# Altium PCB Ender-3.PcbDoc (part 9 of 14)
Units mil, origin at the board's own origin, x right, y up, seen from the top; angles counter-clockwise.
Board outline 3970.48 x 2769.68 mil, 2 copper layers (TopLayer, BottomLayer); 146 components, 136 nets, 669 pads, 614 vias.
Unrouted connection lines stored in the file: 1.
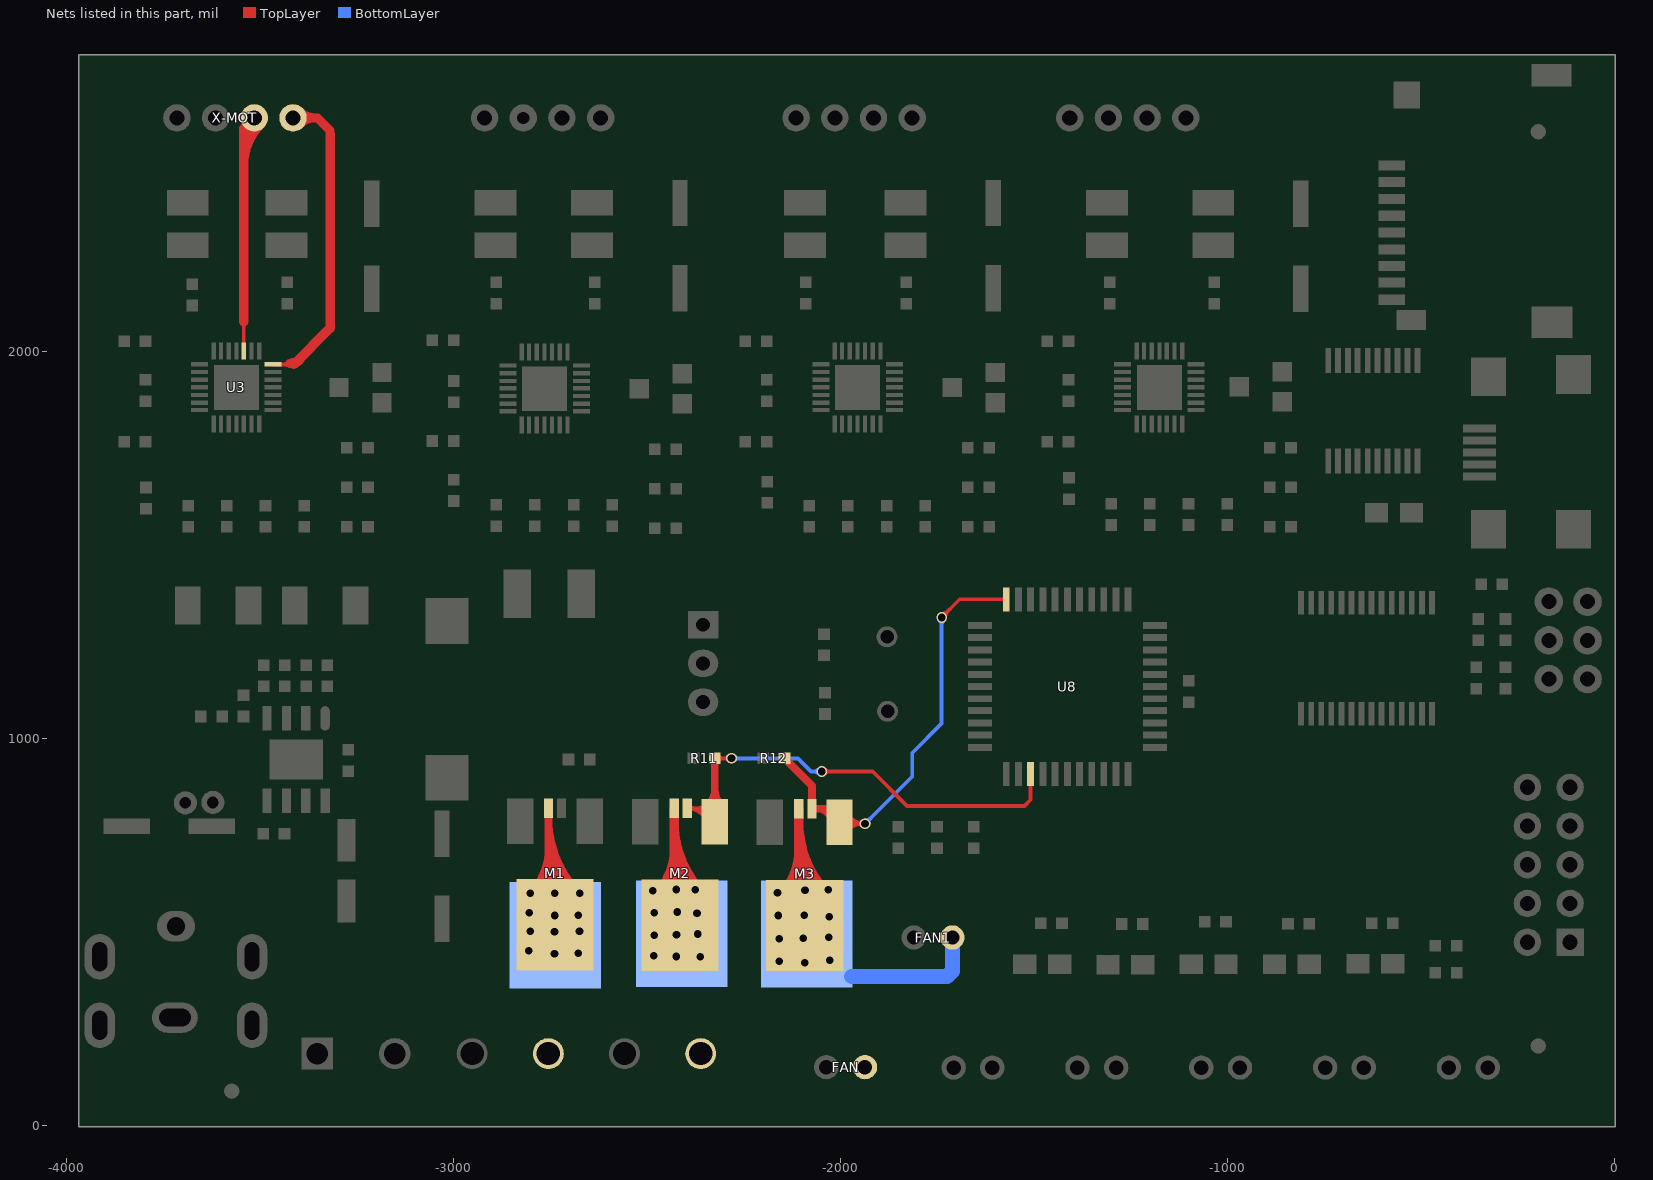
[diagram p9: the nets of this part, all layers, seen from the top]

## Via types
v1: diameter 28, hole 18, TopLayer to BottomLayer, tented both sides, 246 vias
v2: diameter 27.56, hole 19.68, TopLayer to BottomLayer, tented both sides, 196 vias
v3: diameter 20, hole 12, TopLayer to BottomLayer, tented both sides, 124 vias
v4: diameter 27.56, hole 11.81, TopLayer to BottomLayer, tented bottom, 16 vias
v5: diameter 27.56, hole 19.68, TopLayer to BottomLayer, 16 vias
v6: diameter 20, hole 12, TopLayer to BottomLayer, 12 vias
v7: diameter 28, hole 11.81, TopLayer to BottomLayer, tented both sides, 4 vias

## Nets (pads, with @x,y where several pads share a name; then routed paths per layer and width w, separated by ;. In a path a pad name is that pad's centre, name@x,y a point inside that pad or via, vN(x,y) a via of type N, cw(c..) or ccw(c..) an arc to the next point about the centre after c; other vN are vias at no path point) (continued)
NetW1_2: ?.2@-2754.54,820.84 M1.2 pad.0@-2736.54,492.84 pad.1@-2754.69,186.84 | length 7772.8
  TopLayer w10: M1.2@-2754.54,536.84 M1.2@-2737.54,519.84 ; M1.2@-2748.46,549.08 ccw(c-2732.21,540.5) M1.2@-2745.2,527.51 ; M1.2@-2748.46,549.08 ccw(c-2732.21,540.5) M1.2@-2745.2,527.51 ; M1.2@-2748.46,549.08 ccw(c-2732.21,540.5) M1.2@-2745.2,527.51 ; M1.2@-2748.46,549.08 ccw(c-2732.21,540.5) M1.2@-2745.2,527.51 ; M1.2@-2748.46,549.08 ccw(c-2732.21,540.5) M1.2@-2745.2,527.51 ; M1.2@-2748.46,549.08 ccw(c-2732.21,540.5) M1.2@-2745.2,527.51 ; M1.2@-2748.46,549.08 ccw(c-2732.21,540.5) M1.2@-2745.2,527.51 ; M1.2@-2739.61,544.41 ccw(c-2719.67,533.88) M1.2@-2735.62,517.93 ; M1.2@-2739.61,544.41 ccw(c-2719.67,533.88) M1.2@-2735.62,517.93 ; M1.2@-2739.61,544.41 ccw(c-2719.67,533.88) M1.2@-2735.62,517.93 ; M1.2@-2739.61,544.41 ccw(c-2719.67,533.88) M1.2@-2735.62,517.93 ; M1.2@-2739.61,544.41 ccw(c-2719.67,533.88) M1.2@-2735.62,517.93 ; M1.2@-2739.61,544.41 ccw(c-2719.67,533.88) M1.2@-2735.62,517.93 ; M1.2@-2739.61,544.41 ccw(c-2719.67,533.88) M1.2@-2735.62,517.93
  TopLayer w20: M1.2@-2754.54,536.84 ?.2@-2754.54,820.84 ; v2(-2801.17,601.48) ccw(c-2913.77,714.08) -2754.54,714.08 ; v2(-2801.17,601.48) ccw(c-2913.77,714.08) -2754.54,714.08 ; v2(-2801.17,601.48) ccw(c-2913.77,714.08) -2754.54,714.08 ; v2(-2801.17,601.48) ccw(c-2913.77,714.08) -2754.54,714.08 ; v2(-2801.17,601.48) ccw(c-2913.77,714.08) -2754.54,714.08 ; v2(-2801.17,601.48) ccw(c-2913.77,714.08) -2754.54,714.08 ; M1.2@-2787.03,587.34 ccw(c-2865.49,665.8) -2754.54,665.8 ; M1.2@-2787.03,587.34 ccw(c-2865.49,665.8) -2754.54,665.8 ; M1.2@-2787.03,587.34 ccw(c-2865.49,665.8) -2754.54,665.8 ; M1.2@-2787.03,587.34 ccw(c-2865.49,665.8) -2754.54,665.8 ; M1.2@-2787.03,587.34 ccw(c-2865.49,665.8) -2754.54,665.8 ; M1.2@-2787.03,587.34 ccw(c-2865.49,665.8) -2754.54,665.8 ; M1.2@-2754.9,454.45 cw(c-2691.14,454.45) M1.2@-2736.22,499.53 ; M1.2@-2754.9,454.45 cw(c-2691.14,454.45) M1.2@-2736.22,499.53 ; M1.2@-2754.9,454.45 cw(c-2691.14,454.45) M1.2@-2736.22,499.53 ; M1.2@-2754.9,454.45 cw(c-2691.14,454.45) M1.2@-2736.22,499.53 ; M1.2@-2754.9,454.45 cw(c-2691.14,454.45) M1.2@-2736.22,499.53 ; M1.2@-2754.9,454.45 cw(c-2691.14,454.45) M1.2@-2736.22,499.53 ; M1.2@-2754.9,454.45 cw(c-2691.14,454.45) M1.2@-2736.22,499.53 ; M1.2@-2754.9,454.45 cw(c-2691.14,454.45) M1.2@-2736.22,499.53 ; M1.2@-2754.9,492.95 ccw(c-2691.14,492.95) M1.2@-2736.22,447.88 ; M1.2@-2754.9,492.95 ccw(c-2691.14,492.95) M1.2@-2736.22,447.88 ; M1.2@-2754.9,492.95 ccw(c-2691.14,492.95) M1.2@-2736.22,447.88 ; M1.2@-2754.9,492.95 ccw(c-2691.14,492.95) M1.2@-2736.22,447.88 ; M1.2@-2754.9,492.95 ccw(c-2691.14,492.95) M1.2@-2736.22,447.88 ; M1.2@-2754.9,492.95 ccw(c-2691.14,492.95) M1.2@-2736.22,447.88 ; M1.2@-2754.9,492.95 ccw(c-2691.14,492.95) M1.2@-2736.22,447.88 ; M1.2@-2754.9,492.95 ccw(c-2691.14,492.95) M1.2@-2736.22,447.88 ; M1.2@-2754.54,553.09 cw(c-2690.78,553.09) M1.2@-2735.86,598.17 ; M1.2@-2754.54,553.09 cw(c-2690.78,553.09) M1.2@-2735.86,598.17 ; M1.2@-2754.54,553.09 cw(c-2690.78,553.09) M1.2@-2735.86,598.17 ; M1.2@-2754.54,553.09 cw(c-2690.78,553.09) M1.2@-2735.86,598.17 ; M1.2@-2754.54,553.09 cw(c-2690.78,553.09) M1.2@-2735.86,598.17 ; M1.2@-2754.54,553.09 cw(c-2690.78,553.09) M1.2@-2735.86,598.17 ; M1.2@-2754.54,553.09 cw(c-2690.78,553.09) M1.2@-2735.86,598.17 ; M1.2@-2754.54,553.09 cw(c-2690.78,553.09) M1.2@-2735.86,598.17 ; M1.2@-2754.54,591.59 ccw(c-2690.78,591.59) M1.2@-2735.86,546.51 ; M1.2@-2754.54,591.59 ccw(c-2690.78,591.59) M1.2@-2735.86,546.51 ; M1.2@-2754.54,591.59 ccw(c-2690.78,591.59) M1.2@-2735.86,546.51 ; M1.2@-2754.54,591.59 ccw(c-2690.78,591.59) M1.2@-2735.86,546.51 ; M1.2@-2754.54,591.59 ccw(c-2690.78,591.59) M1.2@-2735.86,546.51 ; M1.2@-2754.54,591.59 ccw(c-2690.78,591.59) M1.2@-2735.86,546.51 ; M1.2@-2754.54,591.59 ccw(c-2690.78,591.59) M1.2@-2735.86,546.51 ; M1.2@-2754.54,591.59 ccw(c-2690.78,591.59) M1.2@-2735.86,546.51 ; -2754.54,648.59 ccw(c-2690.78,648.59) M1.2@-2735.86,603.51 ; -2754.54,648.59 ccw(c-2690.78,648.59) M1.2@-2735.86,603.51 ; -2754.54,648.59 ccw(c-2690.78,648.59) M1.2@-2735.86,603.51 ; -2754.54,648.59 ccw(c-2690.78,648.59) M1.2@-2735.86,603.51 ; -2754.54,648.59 ccw(c-2690.78,648.59) M1.2@-2735.86,603.51 ; -2754.54,648.59 ccw(c-2690.78,648.59) M1.2@-2735.86,603.51 ; -2754.54,648.59 ccw(c-2690.78,648.59) M1.2@-2735.86,603.51 ; -2754.54,648.59 ccw(c-2690.78,648.59) M1.2@-2735.86,603.51 ; -2754.54,651.31 ccw(c-2624.07,651.31) M1.2@-2716.32,559.06 ; -2754.54,651.31 ccw(c-2624.07,651.31) M1.2@-2716.32,559.06 ; -2754.54,651.31 ccw(c-2624.07,651.31) M1.2@-2716.32,559.06 ; -2754.54,651.31 ccw(c-2624.07,651.31) M1.2@-2716.32,559.06 ; -2754.54,651.31 ccw(c-2624.07,651.31) M1.2@-2716.32,559.06 ; -2754.54,651.31 ccw(c-2624.07,651.31) M1.2@-2716.32,559.06 ; -2754.54,699.59 ccw(c-2575.78,699.59) M1.2@-2702.18,573.2 ; -2754.54,699.59 ccw(c-2575.78,699.59) M1.2@-2702.18,573.2 ; -2754.54,699.59 ccw(c-2575.78,699.59) M1.2@-2702.18,573.2 ; -2754.54,699.59 ccw(c-2575.78,699.59) M1.2@-2702.18,573.2 ; -2754.54,699.59 ccw(c-2575.78,699.59) M1.2@-2702.18,573.2 ; -2754.54,699.59 ccw(c-2575.78,699.59) M1.2@-2702.18,573.2 ; -2754.54,747.88 ccw(c-2527.5,747.88) M1.2@-2688.04,587.34 ; -2754.54,747.88 ccw(c-2527.5,747.88) M1.2@-2688.04,587.34 ; -2754.54,747.88 ccw(c-2527.5,747.88) M1.2@-2688.04,587.34 ; -2754.54,747.88 ccw(c-2527.5,747.88) M1.2@-2688.04,587.34 ; -2754.54,747.88 ccw(c-2527.5,747.88) M1.2@-2688.04,587.34 ; -2754.54,747.88 ccw(c-2527.5,747.88) M1.2@-2688.04,587.34 ; ?.2@-2754.54,796.16 ccw(c-2479.21,796.16) v2(-2673.9,601.48) ; ?.2@-2754.54,796.16 ccw(c-2479.21,796.16) v2(-2673.9,601.48) ; ?.2@-2754.54,796.16 ccw(c-2479.21,796.16) v2(-2673.9,601.48) ; ?.2@-2754.54,796.16 ccw(c-2479.21,796.16) v2(-2673.9,601.48) ; ?.2@-2754.54,796.16 ccw(c-2479.21,796.16) v2(-2673.9,601.48) ; ?.2@-2754.54,796.16 ccw(c-2479.21,796.16) v2(-2673.9,601.48)
  other v2: -2738.9,445.2 -2677.9,446.2 -2804.9,452.2 -2738.9,502.2 -2801.54,502.84 -2674.26,502.84 -2738.54,543.84 -2677.54,544.84 -2804.54,550.84 -2738.54,600.84
NetW2_1: ?.1@-2395.54,820.84 M2.1 R11.1 U8.14 | length 5838.6
  TopLayer w10: M2.1@-2324.54,785.84 -2359.54,820.84 ; R11.1@-2324.54,949.84 v2(-2281.54,949.84) ; v2(-2048.54,915.84) -1916.54,915.84 -1827.54,826.84 -1524.54,826.84 -1508.54,842.84 U8.14@-1508.54,908.84 ; ?.1@-2395.54,820.84 cw(c-2395.53,765.72) M2.1@-2349.01,795.29 ; ?.1@-2395.54,820.84 cw(c-2395.53,765.72) M2.1@-2349.01,795.29 ; ?.1@-2395.54,820.84 cw(c-2395.53,765.72) M2.1@-2349.01,795.29 ; ?.1@-2395.54,820.84 cw(c-2395.53,765.72) M2.1@-2349.01,795.29 ; ?.1@-2395.54,820.84 cw(c-2395.53,765.72) M2.1@-2349.01,795.29 ; ?.1@-2395.54,820.84 cw(c-2395.53,765.72) M2.1@-2349.01,795.29 ; ?.1@-2395.54,820.84 cw(c-2395.53,765.72) M2.1@-2349.01,795.29 ; ?.1@-2395.54,820.84 cw(c-2395.53,765.72) M2.1@-2349.01,795.29 ; ?.1@-2395.54,820.84 cw(c-2395.53,765.72) M2.1@-2349.01,795.29 ; ?.1@-2395.54,820.84 -2359.54,820.84 ; ?.1@-2390.59,815.89 cw(c-2378.64,803.94) -2378.64,820.84 ; ?.1@-2390.59,815.89 cw(c-2378.64,803.94) -2378.64,820.84 ; ?.1@-2390.59,815.89 cw(c-2378.64,803.94) -2378.64,820.84 ; ?.1@-2390.59,815.89 cw(c-2378.64,803.94) -2378.64,820.84 ; ?.1@-2390.59,815.89 cw(c-2378.64,803.94) -2378.64,820.84 ; ?.1@-2390.59,815.89 cw(c-2378.64,803.94) -2378.64,820.84 ; ?.1@-2390.59,815.89 cw(c-2378.64,803.94) -2378.64,820.84 ; ?.1@-2390.59,815.89 cw(c-2378.64,803.94) -2378.64,820.84 ; ?.1@-2390.59,815.89 cw(c-2378.64,803.94) -2378.64,820.84 ; ?.1@-2390.59,825.79 ccw(c-2378.64,837.74) -2378.64,820.84 ; ?.1@-2390.59,825.79 ccw(c-2378.64,837.74) -2378.64,820.84 ; ?.1@-2390.59,825.79 ccw(c-2378.64,837.74) -2378.64,820.84 ; ?.1@-2390.59,825.79 ccw(c-2378.64,837.74) -2378.64,820.84 ; ?.1@-2390.59,825.79 ccw(c-2378.64,837.74) -2378.64,820.84 ; ?.1@-2390.59,825.79 ccw(c-2378.64,837.74) -2378.64,820.84 ; ?.1@-2390.59,825.79 ccw(c-2378.64,837.74) -2378.64,820.84 ; ?.1@-2390.59,825.79 ccw(c-2378.64,837.74) -2378.64,820.84 ; ?.1@-2390.59,825.79 ccw(c-2378.64,837.74) -2378.64,820.84 ; -2377.33,820.84 cw(c-2377.33,777.29) M2.1@-2340.57,800.65 ; -2377.33,820.84 cw(c-2377.33,777.29) M2.1@-2340.57,800.65 ; -2377.33,820.84 cw(c-2377.33,777.29) M2.1@-2340.57,800.65 ; -2377.33,820.84 cw(c-2377.33,777.29) M2.1@-2340.57,800.65 ; -2377.33,820.84 cw(c-2377.33,777.29) M2.1@-2340.57,800.65 ; -2377.33,820.84 cw(c-2377.33,777.29) M2.1@-2340.57,800.65 ; -2377.33,820.84 cw(c-2377.33,777.29) M2.1@-2340.57,800.65 ; -2377.33,820.84 cw(c-2377.33,777.29) M2.1@-2340.57,800.65 ; -2377.33,820.84 cw(c-2377.33,777.29) M2.1@-2340.57,800.65 ; -2370.41,820.84 ccw(c-2370.41,856.71) M2.1@-2345.04,831.35 ; -2370.41,820.84 ccw(c-2370.41,856.71) M2.1@-2345.04,831.35 ; -2370.41,820.84 ccw(c-2370.41,856.71) M2.1@-2345.04,831.35 ; -2370.41,820.84 ccw(c-2370.41,856.71) M2.1@-2345.04,831.35 ; -2370.41,820.84 ccw(c-2370.41,856.71) M2.1@-2345.04,831.35 ; -2370.41,820.84 ccw(c-2370.41,856.71) M2.1@-2345.04,831.35 ; -2370.41,820.84 ccw(c-2370.41,856.71) M2.1@-2345.04,831.35 ; -2370.41,820.84 ccw(c-2370.41,856.71) M2.1@-2345.04,831.35 ; -2370.41,820.84 ccw(c-2370.41,856.71) M2.1@-2345.04,831.35 ; -2359.53,820.84 ccw(c-2359.53,833.58) M2.1@-2348.85,826.64 ; -2359.53,820.84 ccw(c-2359.53,833.58) M2.1@-2348.85,826.64 ; -2359.53,820.84 ccw(c-2359.53,833.58) M2.1@-2348.85,826.64 ; -2359.53,820.84 ccw(c-2359.53,833.58) M2.1@-2348.85,826.64 ; -2359.53,820.84 ccw(c-2359.53,833.58) M2.1@-2348.85,826.64 ; -2359.53,820.84 ccw(c-2359.53,833.58) M2.1@-2348.85,826.64 ; -2359.53,820.84 ccw(c-2359.53,833.58) M2.1@-2348.85,826.64 ; -2359.53,820.84 ccw(c-2359.53,833.58) M2.1@-2348.85,826.64 ; -2359.53,820.84 ccw(c-2359.53,833.58) M2.1@-2348.85,826.64 ; -2359.12,820.84 cw(c-2359.12,788.86) M2.1@-2332.13,806.02 ; -2359.12,820.84 cw(c-2359.12,788.86) M2.1@-2332.13,806.02 ; -2359.12,820.84 cw(c-2359.12,788.86) M2.1@-2332.13,806.02 ; -2359.12,820.84 cw(c-2359.12,788.86) M2.1@-2332.13,806.02 ; -2359.12,820.84 cw(c-2359.12,788.86) M2.1@-2332.13,806.02 ; -2359.12,820.84 cw(c-2359.12,788.86) M2.1@-2332.13,806.02 ; -2359.12,820.84 cw(c-2359.12,788.86) M2.1@-2332.13,806.02 ; -2359.12,820.84 cw(c-2359.12,788.86) M2.1@-2332.13,806.02 ; -2359.12,820.84 cw(c-2359.12,788.86) M2.1@-2332.13,806.02 ; M2.1@-2345.04,831.35 ccw(c-2394.55,880.85) -2324.54,880.85 ; M2.1@-2345.04,831.35 ccw(c-2394.55,880.85) -2324.54,880.85 ; M2.1@-2345.04,831.35 ccw(c-2394.55,880.85) -2324.54,880.85 ; M2.1@-2345.04,831.35 ccw(c-2394.55,880.85) -2324.54,880.85 ; M2.1@-2345.04,831.35 ccw(c-2394.55,880.85) -2324.54,880.85 ; M2.1@-2337.97,824.28 ccw(c-2370.41,856.71) -2324.54,856.71 ; M2.1@-2337.97,824.28 ccw(c-2370.41,856.71) -2324.54,856.71 ; M2.1@-2337.97,824.28 ccw(c-2370.41,856.71) -2324.54,856.71 ; M2.1@-2337.97,824.28 ccw(c-2370.41,856.71) -2324.54,856.71 ; M2.1@-2337.97,824.28 ccw(c-2370.41,856.71) -2324.54,856.71 ; R11.1@-2331.61,942.77 cw(c-2348.68,925.7) -2324.54,925.7 ; R11.1@-2331.61,942.77 cw(c-2348.68,925.7) -2324.54,925.7 ; R11.1@-2331.61,942.77 cw(c-2348.68,925.7) -2324.54,925.7 ; R11.1@-2331.61,942.77 cw(c-2348.68,925.7) -2324.54,925.7 ; R11.1@-2331.61,942.77 cw(c-2348.68,925.7) -2324.54,925.7 ; -2324.54,856.71 ccw(c-2278.67,856.71) M2.1@-2311.1,824.28 ; -2324.54,856.71 ccw(c-2278.67,856.71) M2.1@-2311.1,824.28 ; -2324.54,856.71 ccw(c-2278.67,856.71) M2.1@-2311.1,824.28 ; -2324.54,856.71 ccw(c-2278.67,856.71) M2.1@-2311.1,824.28 ; -2324.54,856.71 ccw(c-2278.67,856.71) M2.1@-2311.1,824.28 ; -2324.54,880.85 ccw(c-2254.52,880.85) M2.1@-2304.03,831.35 ; -2324.54,880.85 ccw(c-2254.52,880.85) M2.1@-2304.03,831.35 ; -2324.54,880.85 ccw(c-2254.52,880.85) M2.1@-2304.03,831.35 ; -2324.54,880.85 ccw(c-2254.52,880.85) M2.1@-2304.03,831.35 ; -2324.54,880.85 ccw(c-2254.52,880.85) M2.1@-2304.03,831.35 ; -2324.54,925.7 cw(c-2300.39,925.7) R11.1@-2317.46,942.77 ; -2324.54,925.7 cw(c-2300.39,925.7) R11.1@-2317.46,942.77 ; -2324.54,925.7 cw(c-2300.39,925.7) R11.1@-2317.46,942.77 ; -2324.54,925.7 cw(c-2300.39,925.7) R11.1@-2317.46,942.77 ; -2324.54,925.7 cw(c-2300.39,925.7) R11.1@-2317.46,942.77 ; R11.1@-2317.46,942.77 cw(c-2300.39,925.7) -2300.39,949.84 ; R11.1@-2317.46,942.77 cw(c-2300.39,925.7) -2300.39,949.84 ; R11.1@-2317.46,942.77 cw(c-2300.39,925.7) -2300.39,949.84 ; R11.1@-2317.46,942.77 cw(c-2300.39,925.7) -2300.39,949.84 ; R11.1@-2317.46,942.77 cw(c-2300.39,925.7) -2300.39,949.84 ; R11.1@-2317.46,942.77 cw(c-2300.39,925.7) -2300.39,949.84 ; R11.1@-2317.46,942.77 cw(c-2300.39,925.7) -2300.39,949.84 ; R11.1@-2317.46,942.77 cw(c-2300.39,925.7) -2300.39,949.84 ; R11.1@-2317.46,942.77 cw(c-2300.39,925.7) -2300.39,949.84 ; R11.1@-2317.46,956.91 ccw(c-2300.39,973.98) -2300.39,949.84 ; R11.1@-2317.46,956.91 ccw(c-2300.39,973.98) -2300.39,949.84 ; R11.1@-2317.46,956.91 ccw(c-2300.39,973.98) -2300.39,949.84 ; R11.1@-2317.46,956.91 ccw(c-2300.39,973.98) -2300.39,949.84 ; R11.1@-2317.46,956.91 ccw(c-2300.39,973.98) -2300.39,949.84 ; R11.1@-2317.46,956.91 ccw(c-2300.39,973.98) -2300.39,949.84 ; R11.1@-2317.46,956.91 ccw(c-2300.39,973.98) -2300.39,949.84 ; R11.1@-2317.46,956.91 ccw(c-2300.39,973.98) -2300.39,949.84 ; R11.1@-2317.46,956.91 ccw(c-2300.39,973.98) -2300.39,949.84 ; -2302.73,949.84 cw(c-2302.73,928.65) v2@-2287.74,943.63 ; -2302.73,949.84 ccw(c-2302.73,971.04) v2@-2287.74,956.05 ; -2302.73,949.84 cw(c-2302.73,928.65) v2@-2287.74,943.63 ; -2302.73,949.84 ccw(c-2302.73,971.04) v2@-2287.74,956.05 ; -2302.73,949.84 cw(c-2302.73,928.65) v2@-2287.74,943.63 ; -2302.73,949.84 ccw(c-2302.73,971.04) v2@-2287.74,956.05 ; -2302.73,949.84 cw(c-2302.73,928.65) v2@-2287.74,943.63 ; -2302.73,949.84 ccw(c-2302.73,971.04) v2@-2287.74,956.05 ; -2302.73,949.84 cw(c-2302.73,928.65) v2@-2287.74,943.63 ; -2302.73,949.84 ccw(c-2302.73,971.04) v2@-2287.74,956.05 ; -2302.73,949.84 ccw(c-2302.73,971.04) v2@-2287.74,956.05 ; -2302.73,949.84 cw(c-2302.73,928.65) v2@-2287.74,943.63 ; -2302.73,949.84 ccw(c-2302.73,971.04) v2@-2287.74,956.05 ; -2302.73,949.84 cw(c-2302.73,928.65) v2@-2287.74,943.63 ; -2302.73,949.84 ccw(c-2302.73,971.04) v2@-2287.74,956.05 ; -2302.73,949.84 cw(c-2302.73,928.65) v2@-2287.74,943.63 ; -2302.73,949.84 ccw(c-2302.73,971.04) v2@-2287.74,956.05 ; -2302.73,949.84 cw(c-2302.73,928.65) v2@-2287.74,943.63 ; v2@-2042.33,909.63 cw(c-2027.34,894.65) -2027.34,915.84 ; v2@-2042.33,909.63 cw(c-2027.34,894.65) -2027.34,915.84 ; v2@-2042.33,909.63 cw(c-2027.34,894.65) -2027.34,915.84 ; v2@-2042.33,909.63 cw(c-2027.34,894.65) -2027.34,915.84 ; v2@-2042.33,909.63 cw(c-2027.34,894.65) -2027.34,915.84 ; v2@-2042.33,909.63 cw(c-2027.34,894.65) -2027.34,915.84 ; v2@-2042.33,909.63 cw(c-2027.34,894.65) -2027.34,915.84 ; v2@-2042.33,922.05 ccw(c-2027.34,937.04) -2027.34,915.84 ; v2@-2042.33,922.05 ccw(c-2027.34,937.04) -2027.34,915.84 ; v2@-2042.33,922.05 ccw(c-2027.34,937.04) -2027.34,915.84 ; v2@-2042.33,922.05 ccw(c-2027.34,937.04) -2027.34,915.84 ; v2@-2042.33,922.05 ccw(c-2027.34,937.04) -2027.34,915.84 ; v2@-2042.33,922.05 ccw(c-2027.34,937.04) -2027.34,915.84 ; v2@-2042.33,922.05 ccw(c-2027.34,937.04) -2027.34,915.84 ; U8.14@-1511.36,884.01 cw(c-1518.19,877.19) -1508.54,877.19 ; U8.14@-1511.36,884.01 cw(c-1518.19,877.19) -1508.54,877.19 ; U8.14@-1511.36,884.01 cw(c-1518.19,877.19) -1508.54,877.19 ; U8.14@-1511.36,884.01 cw(c-1518.19,877.19) -1508.54,877.19 ; U8.14@-1511.36,884.01 cw(c-1518.19,877.19) -1508.54,877.19 ; U8.14@-1511.36,884.01 cw(c-1518.19,877.19) -1508.54,877.19 ; -1508.54,877.19 cw(c-1498.88,877.19) U8.14@-1505.71,884.01 ; -1508.54,877.19 cw(c-1498.88,877.19) U8.14@-1505.71,884.01 ; -1508.54,877.19 cw(c-1498.88,877.19) U8.14@-1505.71,884.01 ; -1508.54,877.19 cw(c-1498.88,877.19) U8.14@-1505.71,884.01 ; -1508.54,877.19 cw(c-1498.88,877.19) U8.14@-1505.71,884.01 ; -1508.54,877.19 cw(c-1498.88,877.19) U8.14@-1505.71,884.01
  TopLayer w20: M2.1@-2324.54,785.84 R11.1@-2324.54,949.84 ; M2.1@-2341.51,827.81 ccw(c-2382.48,868.78) -2324.54,868.78 ; M2.1@-2341.51,827.81 ccw(c-2382.48,868.78) -2324.54,868.78 ; M2.1@-2341.51,827.81 ccw(c-2382.48,868.78) -2324.54,868.78 ; M2.1@-2341.51,827.81 ccw(c-2382.48,868.78) -2324.54,868.78 ; -2324.54,868.78 ccw(c-2266.59,868.78) M2.1@-2307.56,827.81 ; -2324.54,868.78 ccw(c-2266.59,868.78) M2.1@-2307.56,827.81 ; -2324.54,868.78 ccw(c-2266.59,868.78) M2.1@-2307.56,827.81 ; -2324.54,868.78 ccw(c-2266.59,868.78) M2.1@-2307.56,827.81
  BottomLayer w10: v2(-2281.54,949.84) -2109.54,949.84 -2075.54,915.84 v2(-2048.54,915.84) ; v2@-2275.33,943.63 cw(c-2260.34,928.65) -2260.34,949.84 ; v2@-2275.33,943.63 cw(c-2260.34,928.65) -2260.34,949.84 ; v2@-2275.33,943.63 cw(c-2260.34,928.65) -2260.34,949.84 ; v2@-2275.33,943.63 cw(c-2260.34,928.65) -2260.34,949.84 ; v2@-2275.33,943.63 cw(c-2260.34,928.65) -2260.34,949.84 ; v2@-2275.33,943.63 cw(c-2260.34,928.65) -2260.34,949.84 ; v2@-2275.33,943.63 cw(c-2260.34,928.65) -2260.34,949.84 ; v2@-2275.33,943.63 cw(c-2260.34,928.65) -2260.34,949.84 ; v2@-2275.33,943.63 cw(c-2260.34,928.65) -2260.34,949.84 ; v2@-2275.33,956.05 ccw(c-2260.34,971.04) -2260.34,949.84 ; v2@-2275.33,956.05 ccw(c-2260.34,971.04) -2260.34,949.84 ; v2@-2275.33,956.05 ccw(c-2260.34,971.04) -2260.34,949.84 ; v2@-2275.33,956.05 ccw(c-2260.34,971.04) -2260.34,949.84 ; v2@-2275.33,956.05 ccw(c-2260.34,971.04) -2260.34,949.84 ; v2@-2275.33,956.05 ccw(c-2260.34,971.04) -2260.34,949.84 ; v2@-2275.33,956.05 ccw(c-2260.34,971.04) -2260.34,949.84 ; v2@-2275.33,956.05 ccw(c-2260.34,971.04) -2260.34,949.84 ; v2@-2275.33,956.05 ccw(c-2260.34,971.04) -2260.34,949.84 ; -2069.73,915.84 cw(c-2069.73,894.65) v2@-2054.74,909.63 ; -2069.73,915.84 ccw(c-2069.73,937.04) v2@-2054.74,922.05 ; -2069.73,915.84 cw(c-2069.73,894.65) v2@-2054.74,909.63 ; -2069.73,915.84 ccw(c-2069.73,937.04) v2@-2054.74,922.05 ; -2069.73,915.84 ccw(c-2069.73,937.04) v2@-2054.74,922.05 ; -2069.73,915.84 cw(c-2069.73,894.65) v2@-2054.74,909.63 ; -2069.73,915.84 ccw(c-2069.73,937.04) v2@-2054.74,922.05 ; -2069.73,915.84 cw(c-2069.73,894.65) v2@-2054.74,909.63
NetW2_2: ?.2@-2429.54,820.84 M2.2 pad.1@-2360.98,186.84 pad.1@-2409.54,496.84 | length 5072.2
  TopLayer w10: M2.2@-2429.54,535.84 M2.2@-2419.54,525.84
  TopLayer w24: M2.2@-2429.54,534.06 cw(c-2408.38,534.06) M2.2@-2420.51,551.38 ; ?.2@-2429.54,820.84 M2.2@-2429.54,535.84 ; M2.2@-2476.76,599.07 ccw(c-2590.77,713.08) -2429.54,713.08 ; M2.2@-2476.76,599.07 ccw(c-2590.77,713.08) -2429.54,713.08 ; M2.2@-2476.76,599.07 ccw(c-2590.77,713.08) -2429.54,713.08 ; M2.2@-2476.76,599.07 ccw(c-2590.77,713.08) -2429.54,713.08 ; M2.2@-2476.76,599.07 ccw(c-2590.77,713.08) -2429.54,713.08 ; M2.2@-2476.76,599.07 ccw(c-2590.77,713.08) -2429.54,713.08 ; M2.2@-2459.79,582.1 ccw(c-2532.83,655.14) -2429.54,655.14 ; M2.2@-2459.79,582.1 ccw(c-2532.83,655.14) -2429.54,655.14 ; M2.2@-2459.79,582.1 ccw(c-2532.83,655.14) -2429.54,655.14 ; M2.2@-2459.79,582.1 ccw(c-2532.83,655.14) -2429.54,655.14 ; M2.2@-2459.79,582.1 ccw(c-2532.83,655.14) -2429.54,655.14 ; M2.2@-2459.79,582.1 ccw(c-2532.83,655.14) -2429.54,655.14 ; M2.2@-2429.54,535.84 cw(c-2411.65,535.84) M2.2@-2420.64,551.3 ; M2.2@-2429.54,535.84 cw(c-2411.65,535.84) M2.2@-2420.64,551.3 ; M2.2@-2429.54,535.84 cw(c-2411.65,535.84) M2.2@-2420.64,551.3 ; M2.2@-2429.54,535.84 cw(c-2411.65,535.84) M2.2@-2420.64,551.3 ; M2.2@-2429.54,535.84 cw(c-2411.65,535.84) M2.2@-2420.64,551.3 ; M2.2@-2429.54,535.84 cw(c-2411.65,535.84) M2.2@-2420.64,551.3 ; M2.2@-2429.54,535.84 cw(c-2411.65,535.84) M2.2@-2420.64,551.3 ; M2.2@-2429.54,576.45 ccw(c-2397.93,576.45) M2.2@-2420.28,554.1 ; M2.2@-2429.54,576.45 ccw(c-2397.93,576.45) M2.2@-2420.28,554.1 ; M2.2@-2429.54,576.45 ccw(c-2397.93,576.45) M2.2@-2420.28,554.1 ; M2.2@-2429.54,576.45 ccw(c-2397.93,576.45) M2.2@-2420.28,554.1 ; M2.2@-2429.54,576.45 ccw(c-2397.93,576.45) M2.2@-2420.28,554.1 ; M2.2@-2429.54,576.45 ccw(c-2397.93,576.45) M2.2@-2420.28,554.1 ; M2.2@-2429.54,576.45 ccw(c-2397.93,576.45) M2.2@-2420.28,554.1 ; M2.2@-2429.54,576.45 ccw(c-2397.93,576.45) M2.2@-2420.28,554.1 ; M2.2@-2429.54,594.48 cw(c-2408.17,594.48) M2.2@-2423.28,609.58 ; M2.2@-2429.54,594.48 cw(c-2408.17,594.48) M2.2@-2423.28,609.58 ; M2.2@-2429.54,594.48 cw(c-2408.17,594.48) M2.2@-2423.28,609.58 ; M2.2@-2429.54,594.48 cw(c-2408.17,594.48) M2.2@-2423.28,609.58 ; M2.2@-2429.54,594.48 cw(c-2408.17,594.48) M2.2@-2423.28,609.58 ; M2.2@-2429.54,594.48 cw(c-2408.17,594.48) M2.2@-2423.28,609.58 ; M2.2@-2429.54,594.48 cw(c-2408.17,594.48) M2.2@-2423.28,609.58 ; M2.2@-2429.54,594.48 cw(c-2408.17,594.48) M2.2@-2423.28,609.58 ; M2.2@-2429.54,627.21 ccw(c-2408.17,627.21) M2.2@-2423.28,612.1 ; M2.2@-2429.54,627.21 ccw(c-2408.17,627.21) M2.2@-2423.28,612.1 ; M2.2@-2429.54,627.21 ccw(c-2408.17,627.21) M2.2@-2423.28,612.1 ; M2.2@-2429.54,627.21 ccw(c-2408.17,627.21) M2.2@-2423.28,612.1 ; M2.2@-2429.54,627.21 ccw(c-2408.17,627.21) M2.2@-2423.28,612.1 ; M2.2@-2429.54,627.21 ccw(c-2408.17,627.21) M2.2@-2423.28,612.1 ; M2.2@-2429.54,627.21 ccw(c-2408.17,627.21) M2.2@-2423.28,612.1 ; M2.2@-2429.54,627.21 ccw(c-2408.17,627.21) M2.2@-2423.28,612.1 ; -2429.54,669.62 ccw(c-2281.75,669.62) M2.2@-2386.25,565.13 ; -2429.54,669.62 ccw(c-2281.75,669.62) M2.2@-2386.25,565.13 ; -2429.54,669.62 ccw(c-2281.75,669.62) M2.2@-2386.25,565.13 ; -2429.54,669.62 ccw(c-2281.75,669.62) M2.2@-2386.25,565.13 ; -2429.54,669.62 ccw(c-2281.75,669.62) M2.2@-2386.25,565.13 ; -2429.54,669.62 ccw(c-2281.75,669.62) M2.2@-2386.25,565.13 ; -2429.54,727.57 ccw(c-2223.81,727.57) M2.2@-2369.28,582.1 ; -2429.54,727.57 ccw(c-2223.81,727.57) M2.2@-2369.28,582.1 ; -2429.54,727.57 ccw(c-2223.81,727.57) M2.2@-2369.28,582.1 ; -2429.54,727.57 ccw(c-2223.81,727.57) M2.2@-2369.28,582.1 ; -2429.54,727.57 ccw(c-2223.81,727.57) M2.2@-2369.28,582.1 ; -2429.54,727.57 ccw(c-2223.81,727.57) M2.2@-2369.28,582.1 ; -2429.54,785.51 ccw(c-2165.87,785.51) M2.2@-2352.31,599.07 ; -2429.54,785.51 ccw(c-2165.87,785.51) M2.2@-2352.31,599.07 ; -2429.54,785.51 ccw(c-2165.87,785.51) M2.2@-2352.31,599.07 ; -2429.54,785.51 ccw(c-2165.87,785.51) M2.2@-2352.31,599.07 ; -2429.54,785.51 ccw(c-2165.87,785.51) M2.2@-2352.31,599.07 ; -2429.54,785.51 ccw(c-2165.87,785.51) M2.2@-2352.31,599.07
  other v2: -2362.54,436.84 -2424.54,437.84 -2482.54,439.84 -2481.54,492.84 -2423.54,493.84 -2368.54,495.84 -2370.54,549.84 -2481.54,550.84 -2421.54,552.84 -2484.54,607.84 -2375.54,609.84 -2424.54,610.84
NetW3_1: ?.1@-2073.54,819.84 M3.1 R12.1 U8.44 | length 5458.6
  TopLayer w10: M3.1@-1979.33,802.24 ccw(c-1936.54,834.34) v2(-1936.54,780.84) -1998.54,780.84 -2037.54,819.84 ; -1956.54,780.84 cw(c-1956.54,819.34) M3.1@-1987.34,796.24 ; v2(-1738.54,1313.84) -1691.54,1360.84 U8.44@-1571.54,1360.84 ; R12.1@-2144.54,939.84 cw(c-2144.54,915.7) -2127.46,932.77 ; R12.1@-2144.54,939.84 cw(c-2144.54,915.7) -2127.46,932.77 ; R12.1@-2144.54,939.84 cw(c-2144.54,915.7) -2127.46,932.77 ; R12.1@-2144.54,939.84 cw(c-2144.54,915.7) -2127.46,932.77 ; R12.1@-2144.54,939.84 cw(c-2144.54,915.7) -2127.46,932.77 ; R12.1@-2134.54,949.84 ccw(c-2110.39,949.84) -2127.46,932.77 ; R12.1@-2134.54,949.84 ccw(c-2110.39,949.84) -2127.46,932.77 ; R12.1@-2134.54,949.84 ccw(c-2110.39,949.84) -2127.46,932.77 ; R12.1@-2134.54,949.84 ccw(c-2110.39,949.84) -2127.46,932.77 ; R12.1@-2134.54,949.84 ccw(c-2110.39,949.84) -2127.46,932.77 ; ?.1@-2078.49,837.79 ccw(c-2090.43,849.74) -2073.54,849.74 ; ?.1@-2078.49,837.79 ccw(c-2090.43,849.74) -2073.54,849.74 ; ?.1@-2078.49,837.79 ccw(c-2090.43,849.74) -2073.54,849.74 ; ?.1@-2073.54,819.84 cw(c-2073.53,764.72) M3.1@-2027.01,794.29 ; ?.1@-2073.54,819.84 cw(c-2073.53,764.72) M3.1@-2027.01,794.29 ; ?.1@-2073.54,819.84 cw(c-2073.53,764.72) M3.1@-2027.01,794.29 ; ?.1@-2073.54,819.84 cw(c-2073.53,764.72) M3.1@-2027.01,794.29 ; ?.1@-2073.54,819.84 cw(c-2073.53,764.72) M3.1@-2027.01,794.29 ; ?.1@-2073.54,819.84 cw(c-2073.53,764.72) M3.1@-2027.01,794.29 ; ?.1@-2073.54,819.84 cw(c-2073.53,764.72) M3.1@-2027.01,794.29 ; ?.1@-2073.54,819.84 cw(c-2073.53,764.72) M3.1@-2027.01,794.29 ; ?.1@-2073.54,819.84 cw(c-2073.53,764.72) M3.1@-2027.01,794.29 ; -2073.54,849.74 ccw(c-2056.64,849.74) ?.1@-2068.59,837.79 ; -2073.54,849.74 ccw(c-2056.64,849.74) ?.1@-2068.59,837.79 ; -2073.54,849.74 ccw(c-2056.64,849.74) ?.1@-2068.59,837.79 ; ?.1@-2068.59,814.89 cw(c-2056.64,802.94) -2056.64,819.84 ; ?.1@-2068.59,814.89 cw(c-2056.64,802.94) -2056.64,819.84 ; ?.1@-2068.59,814.89 cw(c-2056.64,802.94) -2056.64,819.84 ; ?.1@-2068.59,814.89 cw(c-2056.64,802.94) -2056.64,819.84 ; ?.1@-2068.59,814.89 cw(c-2056.64,802.94) -2056.64,819.84 ; ?.1@-2068.59,814.89 cw(c-2056.64,802.94) -2056.64,819.84 ; ?.1@-2068.59,814.89 cw(c-2056.64,802.94) -2056.64,819.84 ; ?.1@-2068.59,814.89 cw(c-2056.64,802.94) -2056.64,819.84 ; ?.1@-2068.59,814.89 cw(c-2056.64,802.94) -2056.64,819.84 ; ?.1@-2068.59,824.79 ccw(c-2056.64,836.74) -2056.64,819.84 ; ?.1@-2068.59,824.79 ccw(c-2056.64,836.74) -2056.64,819.84 ; ?.1@-2068.59,824.79 ccw(c-2056.64,836.74) -2056.64,819.84 ; ?.1@-2068.59,824.79 ccw(c-2056.64,836.74) -2056.64,819.84 ; ?.1@-2068.59,824.79 ccw(c-2056.64,836.74) -2056.64,819.84 ; ?.1@-2068.59,824.79 ccw(c-2056.64,836.74) -2056.64,819.84 ; ?.1@-2068.59,824.79 ccw(c-2056.64,836.74) -2056.64,819.84 ; ?.1@-2068.59,824.79 ccw(c-2056.64,836.74) -2056.64,819.84 ; ?.1@-2068.59,824.79 ccw(c-2056.64,836.74) -2056.64,819.84 ; -2055.33,819.84 cw(c-2055.33,776.29) M3.1@-2018.57,799.65 ; -2055.33,819.84 cw(c-2055.33,776.29) M3.1@-2018.57,799.65 ; -2055.33,819.84 cw(c-2055.33,776.29) M3.1@-2018.57,799.65 ; -2055.33,819.84 cw(c-2055.33,776.29) M3.1@-2018.57,799.65 ; -2055.33,819.84 cw(c-2055.33,776.29) M3.1@-2018.57,799.65 ; -2055.33,819.84 cw(c-2055.33,776.29) M3.1@-2018.57,799.65 ; -2055.33,819.84 cw(c-2055.33,776.29) M3.1@-2018.57,799.65 ; -2055.33,819.84 cw(c-2055.33,776.29) M3.1@-2018.57,799.65 ; -2055.33,819.84 cw(c-2055.33,776.29) M3.1@-2018.57,799.65 ; -2048.41,819.84 ccw(c-2048.41,855.71) M3.1@-2023.04,830.35 ; -2048.41,819.84 ccw(c-2048.41,855.71) M3.1@-2023.04,830.35 ; -2048.41,819.84 ccw(c-2048.41,855.71) M3.1@-2023.04,830.35 ; -2048.41,819.84 ccw(c-2048.41,855.71) M3.1@-2023.04,830.35 ; -2048.41,819.84 ccw(c-2048.41,855.71) M3.1@-2023.04,830.35 ; -2048.41,819.84 ccw(c-2048.41,855.71) M3.1@-2023.04,830.35 ; -2048.41,819.84 ccw(c-2048.41,855.71) M3.1@-2023.04,830.35 ; -2048.41,819.84 ccw(c-2048.41,855.71) M3.1@-2023.04,830.35 ; -2048.41,819.84 ccw(c-2048.41,855.71) M3.1@-2023.04,830.35 ; -2037.53,819.84 ccw(c-2037.53,832.58) M3.1@-2026.85,825.64 ; -2037.53,819.84 ccw(c-2037.53,832.58) M3.1@-2026.85,825.64 ; -2037.53,819.84 ccw(c-2037.53,832.58) M3.1@-2026.85,825.64 ; -2037.53,819.84 ccw(c-2037.53,832.58) M3.1@-2026.85,825.64 ; -2037.53,819.84 ccw(c-2037.53,832.58) M3.1@-2026.85,825.64 ; -2037.53,819.84 ccw(c-2037.53,832.58) M3.1@-2026.85,825.64 ; -2037.53,819.84 ccw(c-2037.53,832.58) M3.1@-2026.85,825.64 ; -2037.53,819.84 ccw(c-2037.53,832.58) M3.1@-2026.85,825.64 ; -2037.53,819.84 ccw(c-2037.53,832.58) M3.1@-2026.85,825.64 ; -2037.12,819.84 cw(c-2037.12,787.86) M3.1@-2010.13,805.02 ; -2037.12,819.84 cw(c-2037.12,787.86) M3.1@-2010.13,805.02 ; -2037.12,819.84 cw(c-2037.12,787.86) M3.1@-2010.13,805.02 ; -2037.12,819.84 cw(c-2037.12,787.86) M3.1@-2010.13,805.02 ; -2037.12,819.84 cw(c-2037.12,787.86) M3.1@-2010.13,805.02 ; -2037.12,819.84 cw(c-2037.12,787.86) M3.1@-2010.13,805.02 ; -2037.12,819.84 cw(c-2037.12,787.86) M3.1@-2010.13,805.02 ; -2037.12,819.84 cw(c-2037.12,787.86) M3.1@-2010.13,805.02 ; -2037.12,819.84 cw(c-2037.12,787.86) M3.1@-2010.13,805.02 ; M3.1@-1989.1,771.41 cw(c-1966.32,748.63) -1966.32,780.84 ; M3.1@-1989.1,771.41 cw(c-1966.32,748.63) -1966.32,780.84 ; M3.1@-1989.1,771.41 cw(c-1966.32,748.63) -1966.32,780.84 ; M3.1@-1989.1,771.41 cw(c-1966.32,748.63) -1966.32,780.84 ; M3.1@-1989.1,771.41 cw(c-1966.32,748.63) -1966.32,780.84 ; M3.1@-1989.1,771.41 cw(c-1966.32,748.63) -1966.32,780.84 ; M3.1@-1989.1,771.41 cw(c-1966.32,748.63) -1966.32,780.84 ; M3.1@-1987.35,796.26 ccw(c-1956.45,819.51) -1956.45,780.84 ; M3.1@-1987.35,796.26 ccw(c-1956.45,819.51) -1956.45,780.84 ; M3.1@-1987.35,796.26 ccw(c-1956.45,819.51) -1956.45,780.84 ; M3.1@-1987.35,796.26 ccw(c-1956.45,819.51) -1956.45,780.84 ; M3.1@-1987.35,796.26 ccw(c-1956.45,819.51) -1956.45,780.84 ; M3.1@-1987.35,796.26 ccw(c-1956.45,819.51) -1956.45,780.84 ; M3.1@-1982.03,764.34 cw(c-1942.18,724.49) v2@-1942.18,780.84 ; M3.1@-1982.03,764.34 cw(c-1942.18,724.49) v2@-1942.18,780.84 ; M3.1@-1982.03,764.34 cw(c-1942.18,724.49) v2@-1942.18,780.84 ; M3.1@-1982.03,764.34 cw(c-1942.18,724.49) v2@-1942.18,780.84 ; M3.1@-1982.03,764.34 cw(c-1942.18,724.49) v2@-1942.18,780.84 ; M3.1@-1982.03,764.34 cw(c-1942.18,724.49) v2@-1942.18,780.84 ; M3.1@-1982.03,764.34 cw(c-1942.18,724.49) v2@-1942.18,780.84 ; M3.1@-1979.36,802.28 ccw(c-1936.42,834.58) v2@-1936.42,780.84 ; M3.1@-1979.36,802.28 ccw(c-1936.42,834.58) v2@-1936.42,780.84 ; M3.1@-1979.36,802.28 ccw(c-1936.42,834.58) v2@-1936.42,780.84 ; M3.1@-1979.36,802.28 ccw(c-1936.42,834.58) v2@-1936.42,780.84 ; M3.1@-1979.36,802.28 ccw(c-1936.42,834.58) v2@-1936.42,780.84 ; M3.1@-1979.36,802.28 ccw(c-1936.42,834.58) v2@-1936.42,780.84 ; -1957.73,780.84 cw(c-1957.73,759.65) v2@-1942.74,774.63 ; -1957.73,780.84 ccw(c-1957.73,802.04) v2@-1942.74,787.05 ; -1957.73,780.84 cw(c-1957.73,759.65) v2@-1942.74,774.63 ; -1957.73,780.84 ccw(c-1957.73,802.04) v2@-1942.74,787.05 ; -1957.73,780.84 cw(c-1957.73,759.65) v2@-1942.74,774.63 ; -1957.73,780.84 ccw(c-1957.73,802.04) v2@-1942.74,787.05 ; -1957.73,780.84 cw(c-1957.73,759.65) v2@-1942.74,774.63 ; -1957.73,780.84 ccw(c-1957.73,802.04) v2@-1942.74,787.05 ; -1957.73,780.84 ccw(c-1957.73,802.04) v2@-1942.74,787.05 ; -1957.73,780.84 cw(c-1957.73,759.65) v2@-1942.74,774.63 ; -1957.73,780.84 ccw(c-1957.73,802.04) v2@-1942.74,787.05 ; -1957.73,780.84 cw(c-1957.73,759.65) v2@-1942.74,774.63 ; -1957.73,780.84 ccw(c-1957.73,802.04) v2@-1942.74,787.05 ; -1957.73,780.84 cw(c-1957.73,759.65) v2@-1942.74,774.63 ; v2@-1738.54,1322.62 ccw(c-1738.54,1343.82) -1723.55,1328.83 ; v2@-1738.54,1322.62 ccw(c-1738.54,1343.82) -1723.55,1328.83 ; v2@-1738.54,1322.62 ccw(c-1738.54,1343.82) -1723.55,1328.83 ; v2@-1738.54,1322.62 ccw(c-1738.54,1343.82) -1723.55,1328.83 ; v2@-1738.54,1322.62 ccw(c-1738.54,1343.82) -1723.55,1328.83 ; v2@-1738.54,1322.62 ccw(c-1738.54,1343.82) -1723.55,1328.83 ; v2@-1738.54,1322.62 ccw(c-1738.54,1343.82) -1723.55,1328.83 ; v2@-1738.54,1322.62 ccw(c-1738.54,1343.82) -1723.55,1328.83 ; v2@-1738.54,1322.62 ccw(c-1738.54,1343.82) -1723.55,1328.83 ; v2@-1729.76,1313.84 cw(c-1708.56,1313.84) -1723.55,1328.83 ; v2@-1729.76,1313.84 cw(c-1708.56,1313.84) -1723.55,1328.83 ; v2@-1729.76,1313.84 cw(c-1708.56,1313.84) -1723.55,1328.83 ; v2@-1729.76,1313.84 cw(c-1708.56,1313.84) -1723.55,1328.83 ; v2@-1729.76,1313.84 cw(c-1708.56,1313.84) -1723.55,1328.83 ; v2@-1729.76,1313.84 cw(c-1708.56,1313.84) -1723.55,1328.83 ; v2@-1729.76,1313.84 cw(c-1708.56,1313.84) -1723.55,1328.83 ; v2@-1729.76,1313.84 cw(c-1708.56,1313.84) -1723.55,1328.83 ; v2@-1729.76,1313.84 cw(c-1708.56,1313.84) -1723.55,1328.83 ; -1581.19,1360.84 cw(c-1581.19,1351.19) U8.44@-1574.36,1358.01 ; -1581.19,1360.84 ccw(c-1581.19,1370.5) U8.44@-1574.36,1363.67 ; -1581.19,1360.84 cw(c-1581.19,1351.19) U8.44@-1574.36,1358.01 ; -1581.19,1360.84 ccw(c-1581.19,1370.5) U8.44@-1574.36,1363.67 ; -1581.19,1360.84 cw(c-1581.19,1351.19) U8.44@-1574.36,1358.01 ; -1581.19,1360.84 ccw(c-1581.19,1370.5) U8.44@-1574.36,1363.67 ; -1581.19,1360.84 cw(c-1581.19,1351.19) U8.44@-1574.36,1358.01 ; -1581.19,1360.84 ccw(c-1581.19,1370.5) U8.44@-1574.36,1363.67 ; -1581.19,1360.84 cw(c-1581.19,1351.19) U8.44@-1574.36,1358.01 ; -1581.19,1360.84 ccw(c-1581.19,1370.5) U8.44@-1574.36,1363.67 ; -1581.19,1360.84 ccw(c-1581.19,1370.5) U8.44@-1574.36,1363.67 ; -1581.19,1360.84 cw(c-1581.19,1351.19) U8.44@-1574.36,1358.01 ; -1581.19,1360.84 ccw(c-1581.19,1370.5) U8.44@-1574.36,1363.67 ; -1581.19,1360.84 cw(c-1581.19,1351.19) U8.44@-1574.36,1358.01 ; -1581.19,1360.84 ccw(c-1581.19,1370.5) U8.44@-1574.36,1363.67 ; -1581.19,1360.84 cw(c-1581.19,1351.19) U8.44@-1574.36,1358.01 ; -1581.19,1360.84 ccw(c-1581.19,1370.5) U8.44@-1574.36,1363.67 ; -1581.19,1360.84 cw(c-1581.19,1351.19) U8.44@-1574.36,1358.01
  TopLayer w20: R12.1@-2144.54,949.84 -2073.54,878.84 ?.1@-2073.54,819.84 -2037.54,819.84
  BottomLayer w10: v2(-1936.54,780.84) -1814.54,902.84 -1814.54,963.84 -1738.54,1039.84 v2(-1738.54,1313.84) ; v2@-1936.54,789.62 ccw(c-1936.54,810.82) -1921.55,795.83 ; v2@-1936.54,789.62 ccw(c-1936.54,810.82) -1921.55,795.83 ; v2@-1936.54,789.62 ccw(c-1936.54,810.82) -1921.55,795.83 ; v2@-1936.54,789.62 ccw(c-1936.54,810.82) -1921.55,795.83 ; v2@-1936.54,789.62 ccw(c-1936.54,810.82) -1921.55,795.83 ; v2@-1936.54,789.62 ccw(c-1936.54,810.82) -1921.55,795.83 ; v2@-1936.54,789.62 ccw(c-1936.54,810.82) -1921.55,795.83 ; v2@-1927.76,780.84 cw(c-1906.56,780.84) -1921.55,795.83 ; v2@-1927.76,780.84 cw(c-1906.56,780.84) -1921.55,795.83 ; v2@-1927.76,780.84 cw(c-1906.56,780.84) -1921.55,795.83 ; v2@-1927.76,780.84 cw(c-1906.56,780.84) -1921.55,795.83 ; v2@-1927.76,780.84 cw(c-1906.56,780.84) -1921.55,795.83 ; v2@-1927.76,780.84 cw(c-1906.56,780.84) -1921.55,795.83 ; v2@-1927.76,780.84 cw(c-1906.56,780.84) -1921.55,795.83 ; v2@-1744.74,1307.63 cw(c-1759.73,1292.65) -1738.54,1292.65 ; v2@-1744.74,1307.63 cw(c-1759.73,1292.65) -1738.54,1292.65 ; v2@-1744.74,1307.63 cw(c-1759.73,1292.65) -1738.54,1292.65 ; v2@-1744.74,1307.63 cw(c-1759.73,1292.65) -1738.54,1292.65 ; v2@-1744.74,1307.63 cw(c-1759.73,1292.65) -1738.54,1292.65 ; v2@-1744.74,1307.63 cw(c-1759.73,1292.65) -1738.54,1292.65 ; v2@-1744.74,1307.63 cw(c-1759.73,1292.65) -1738.54,1292.65 ; v2@-1744.74,1307.63 cw(c-1759.73,1292.65) -1738.54,1292.65 ; v2@-1744.74,1307.63 cw(c-1759.73,1292.65) -1738.54,1292.65 ; -1738.54,1292.65 cw(c-1717.34,1292.65) v2@-1732.33,1307.63 ; -1738.54,1292.65 cw(c-1717.34,1292.65) v2@-1732.33,1307.63 ; -1738.54,1292.65 cw(c-1717.34,1292.65) v2@-1732.33,1307.63 ; -1738.54,1292.65 cw(c-1717.34,1292.65) v2@-1732.33,1307.63 ; -1738.54,1292.65 cw(c-1717.34,1292.65) v2@-1732.33,1307.63 ; -1738.54,1292.65 cw(c-1717.34,1292.65) v2@-1732.33,1307.63 ; -1738.54,1292.65 cw(c-1717.34,1292.65) v2@-1732.33,1307.63 ; -1738.54,1292.65 cw(c-1717.34,1292.65) v2@-1732.33,1307.63 ; -1738.54,1292.65 cw(c-1717.34,1292.65) v2@-1732.33,1307.63
NetW3_2: ?.2@-2107.54,819.84 FAN1.1 FAN.1 M3.2 pad.1@-2087.54,495.84 | length 8371.8
  TopLayer w10: M3.2@-2169.54,440.84 M3.2@-2092.54,517.84 ; M3.2@-2107.54,532.84 M3.2@-2022.54,447.84 ; M3.2@-2169.76,425.84 cw(c-2134.08,425.84) M3.2@-2159.31,451.07 ; M3.2@-2169.76,425.84 cw(c-2134.08,425.84) M3.2@-2159.31,451.07 ; M3.2@-2169.76,425.84 cw(c-2134.08,425.84) M3.2@-2159.31,451.07 ; M3.2@-2169.76,425.84 cw(c-2134.08,425.84) M3.2@-2159.31,451.07 ; M3.2@-2169.76,425.84 cw(c-2134.08,425.84) M3.2@-2159.31,451.07 ; M3.2@-2169.76,425.84 cw(c-2134.08,425.84) M3.2@-2159.31,451.07 ; M3.2@-2169.76,425.84 cw(c-2134.08,425.84) M3.2@-2159.31,451.07 ; M3.2@-2169.76,425.84 cw(c-2134.08,425.84) M3.2@-2159.31,451.07 ; M3.2@-2159.76,425.84 cw(c-2099.93,425.84) M3.2@-2142.23,468.14 ; M3.2@-2159.76,425.84 cw(c-2099.93,425.84) M3.2@-2142.23,468.14 ; M3.2@-2159.76,425.84 cw(c-2099.93,425.84) M3.2@-2142.23,468.14 ; M3.2@-2159.76,425.84 cw(c-2099.93,425.84) M3.2@-2142.23,468.14 ; M3.2@-2159.76,425.84 cw(c-2099.93,425.84) M3.2@-2142.23,468.14 ; M3.2@-2159.76,425.84 cw(c-2099.93,425.84) M3.2@-2142.23,468.14 ; M3.2@-2159.76,425.84 cw(c-2099.93,425.84) M3.2@-2142.23,468.14 ; M3.2@-2159.76,425.84 cw(c-2099.93,425.84) M3.2@-2142.23,468.14 ; M3.2@-2149.76,425.84 cw(c-2065.79,425.84) M3.2@-2125.16,485.21 ; M3.2@-2149.76,425.84 cw(c-2065.79,425.84) M3.2@-2125.16,485.21 ; M3.2@-2149.76,425.84 cw(c-2065.79,425.84) M3.2@-2125.16,485.21 ; M3.2@-2149.76,425.84 cw(c-2065.79,425.84) M3.2@-2125.16,485.21 ; M3.2@-2149.76,425.84 cw(c-2065.79,425.84) M3.2@-2125.16,485.21 ; M3.2@-2149.76,425.84 cw(c-2065.79,425.84) M3.2@-2125.16,485.21 ; M3.2@-2149.76,425.84 cw(c-2065.79,425.84) M3.2@-2125.16,485.21 ; M3.2@-2149.76,425.84 cw(c-2065.79,425.84) M3.2@-2125.16,485.21 ; M3.2@-2104.76,544.84 ccw(c-2069.08,544.84) M3.2@-2094.31,519.61 ; M3.2@-2104.76,544.84 ccw(c-2069.08,544.84) M3.2@-2094.31,519.61 ; M3.2@-2104.76,544.84 ccw(c-2069.08,544.84) M3.2@-2094.31,519.61 ; M3.2@-2104.76,544.84 ccw(c-2069.08,544.84) M3.2@-2094.31,519.61 ; M3.2@-2104.76,544.84 ccw(c-2069.08,544.84) M3.2@-2094.31,519.61 ; M3.2@-2104.76,544.84 ccw(c-2069.08,544.84) M3.2@-2094.31,519.61 ; M3.2@-2104.76,544.84 ccw(c-2069.08,544.84) M3.2@-2094.31,519.61 ; M3.2@-2104.76,544.84 ccw(c-2069.08,544.84) M3.2@-2094.31,519.61 ; M3.2@-2094.76,544.84 ccw(c-2034.93,544.84) M3.2@-2077.23,502.54 ; M3.2@-2094.76,544.84 ccw(c-2034.93,544.84) M3.2@-2077.23,502.54 ; M3.2@-2094.76,544.84 ccw(c-2034.93,544.84) M3.2@-2077.23,502.54 ; M3.2@-2094.76,544.84 ccw(c-2034.93,544.84) M3.2@-2077.23,502.54 ; M3.2@-2094.76,544.84 ccw(c-2034.93,544.84) M3.2@-2077.23,502.54 ; M3.2@-2094.76,544.84 ccw(c-2034.93,544.84) M3.2@-2077.23,502.54 ; M3.2@-2094.76,544.84 ccw(c-2034.93,544.84) M3.2@-2077.23,502.54 ; M3.2@-2094.76,544.84 ccw(c-2034.93,544.84) M3.2@-2077.23,502.54 ; M3.2@-2084.76,544.84 ccw(c-2000.79,544.84) M3.2@-2060.16,485.47 ; M3.2@-2084.76,544.84 ccw(c-2000.79,544.84) M3.2@-2060.16,485.47 ; M3.2@-2084.76,544.84 ccw(c-2000.79,544.84) M3.2@-2060.16,485.47 ; M3.2@-2084.76,544.84 ccw(c-2000.79,544.84) M3.2@-2060.16,485.47 ; M3.2@-2084.76,544.84 ccw(c-2000.79,544.84) M3.2@-2060.16,485.47 ; M3.2@-2084.76,544.84 ccw(c-2000.79,544.84) M3.2@-2060.16,485.47 ; M3.2@-2084.76,544.84 ccw(c-2000.79,544.84) M3.2@-2060.16,485.47 ; M3.2@-2084.76,544.84 ccw(c-2000.79,544.84) M3.2@-2060.16,485.47
  TopLayer w24: M3.2@-2107.54,526.4 cw(c-2090.65,526.4) M3.2@-2093.26,543.08 ; M3.2@-2107.54,532.84 ?.2@-2107.54,819.84 ; M3.2@-2154.76,598.07 ccw(c-2268.77,712.08) -2107.54,712.08 ; M3.2@-2154.76,598.07 ccw(c-2268.77,712.08) -2107.54,712.08 ; M3.2@-2154.76,598.07 ccw(c-2268.77,712.08) -2107.54,712.08 ; M3.2@-2154.76,598.07 ccw(c-2268.77,712.08) -2107.54,712.08 ; M3.2@-2154.76,598.07 ccw(c-2268.77,712.08) -2107.54,712.08 ; M3.2@-2154.76,598.07 ccw(c-2268.77,712.08) -2107.54,712.08 ; M3.2@-2137.79,581.1 ccw(c-2210.83,654.14) -2107.54,654.14 ; M3.2@-2137.79,581.1 ccw(c-2210.83,654.14) -2107.54,654.14 ; M3.2@-2137.79,581.1 ccw(c-2210.83,654.14) -2107.54,654.14 ; M3.2@-2137.79,581.1 ccw(c-2210.83,654.14) -2107.54,654.14 ; M3.2@-2137.79,581.1 ccw(c-2210.83,654.14) -2107.54,654.14 ; M3.2@-2137.79,581.1 ccw(c-2210.83,654.14) -2107.54,654.14 ; M3.2@-2107.54,565.92 cw(c-2048.61,565.92) M3.2@-2090.28,607.58 ; M3.2@-2107.54,565.92 cw(c-2048.61,565.92) M3.2@-2090.28,607.58 ; M3.2@-2107.54,565.92 cw(c-2048.61,565.92) M3.2@-2090.28,607.58 ; M3.2@-2107.54,565.92 cw(c-2048.61,565.92) M3.2@-2090.28,607.58 ; M3.2@-2107.54,565.92 cw(c-2048.61,565.92) M3.2@-2090.28,607.58 ; M3.2@-2107.54,565.92 cw(c-2048.61,565.92) M3.2@-2090.28,607.58 ; M3.2@-2107.54,565.92 cw(c-2048.61,565.92) M3.2@-2090.28,607.58 ; M3.2@-2107.54,565.92 cw(c-2048.61,565.92) M3.2@-2090.28,607.58 ; M3.2@-2107.54,582.94 ccw(c-2055.44,582.94) M3.2@-2092.28,546.1 ; M3.2@-2107.54,582.94 ccw(c-2055.44,582.94) M3.2@-2092.28,546.1 ; M3.2@-2107.54,582.94 ccw(c-2055.44,582.94) M3.2@-2092.28,546.1 ; M3.2@-2107.54,582.94 ccw(c-2055.44,582.94) M3.2@-2092.28,546.1 ; M3.2@-2107.54,582.94 ccw(c-2055.44,582.94) M3.2@-2092.28,546.1 ; M3.2@-2107.54,582.94 ccw(c-2055.44,582.94) M3.2@-2092.28,546.1 ; M3.2@-2107.54,582.94 ccw(c-2055.44,582.94) M3.2@-2092.28,546.1 ; M3.2@-2107.54,582.94 ccw(c-2055.44,582.94) M3.2@-2092.28,546.1 ; -2107.54,651.77 ccw(c-2048.61,651.77) M3.2@-2090.28,610.1 ; -2107.54,651.77 ccw(c-2048.61,651.77) M3.2@-2090.28,610.1 ; -2107.54,651.77 ccw(c-2048.61,651.77) M3.2@-2090.28,610.1 ; -2107.54,651.77 ccw(c-2048.61,651.77) M3.2@-2090.28,610.1 ; -2107.54,651.77 ccw(c-2048.61,651.77) M3.2@-2090.28,610.1 ; -2107.54,651.77 ccw(c-2048.61,651.77) M3.2@-2090.28,610.1 ; -2107.54,651.77 ccw(c-2048.61,651.77) M3.2@-2090.28,610.1 ; -2107.54,651.77 ccw(c-2048.61,651.77) M3.2@-2090.28,610.1 ; -2107.54,668.62 ccw(c-1959.75,668.62) M3.2@-2064.25,564.13 ; -2107.54,668.62 ccw(c-1959.75,668.62) M3.2@-2064.25,564.13 ; -2107.54,668.62 ccw(c-1959.75,668.62) M3.2@-2064.25,564.13 ; -2107.54,668.62 ccw(c-1959.75,668.62) M3.2@-2064.25,564.13 ; -2107.54,668.62 ccw(c-1959.75,668.62) M3.2@-2064.25,564.13 ; -2107.54,668.62 ccw(c-1959.75,668.62) M3.2@-2064.25,564.13 ; -2107.54,726.57 ccw(c-1901.81,726.57) M3.2@-2047.28,581.1 ; -2107.54,726.57 ccw(c-1901.81,726.57) M3.2@-2047.28,581.1 ; -2107.54,726.57 ccw(c-1901.81,726.57) M3.2@-2047.28,581.1 ; -2107.54,726.57 ccw(c-1901.81,726.57) M3.2@-2047.28,581.1 ; -2107.54,726.57 ccw(c-1901.81,726.57) M3.2@-2047.28,581.1 ; -2107.54,726.57 ccw(c-1901.81,726.57) M3.2@-2047.28,581.1 ; -2107.54,784.51 ccw(c-1843.87,784.51) M3.2@-2030.31,598.07 ; -2107.54,784.51 ccw(c-1843.87,784.51) M3.2@-2030.31,598.07 ; -2107.54,784.51 ccw(c-1843.87,784.51) M3.2@-2030.31,598.07 ; -2107.54,784.51 ccw(c-1843.87,784.51) M3.2@-2030.31,598.07 ; -2107.54,784.51 ccw(c-1843.87,784.51) M3.2@-2030.31,598.07 ; -2107.54,784.51 ccw(c-1843.87,784.51) M3.2@-2030.31,598.07
  BottomLayer w39.37: pad.1@-1971.54,385.84 -1724.54,385.84 -1710.54,399.84 FAN1.1@-1710.54,486.84
  other v2: -2092.54,421.84 -2158.54,425.84 -2027.54,427.84 -2158.54,483.84 -2096.54,484.84 -2030.54,487.84 -2028.54,540.84 -2160.54,543.84 -2093.54,544.84 -2162.54,602.84 -2091.54,608.84 -2031.54,609.84
NetX-MOT_3: U3.24 X-MOT.3 | length 1990.8
  TopLayer w10: U3.24@-3541.62,2020.84 -3541.62,2077.84
  TopLayer w23.62: -3541.62,2077.84 -3541.62,2577.76 ; -3541.62,2482.42 cw(c-3392.11,2482.42) X-MOT.3@-3497.83,2588.14 ; -3541.62,2482.42 cw(c-3392.11,2482.42) X-MOT.3@-3497.83,2588.14 ; -3541.62,2482.42 cw(c-3392.11,2482.42) X-MOT.3@-3497.83,2588.14 ; -3541.62,2482.42 cw(c-3392.11,2482.42) X-MOT.3@-3497.83,2588.14 ; -3541.62,2482.42 cw(c-3392.11,2482.42) X-MOT.3@-3497.83,2588.14 ; -3541.62,2482.42 cw(c-3392.11,2482.42) X-MOT.3@-3497.83,2588.14 ; -3541.62,2539.45 cw(c-3449.14,2539.45) X-MOT.3@-3514.54,2604.84 ; -3541.62,2539.45 cw(c-3449.14,2539.45) X-MOT.3@-3514.54,2604.84 ; -3541.62,2539.45 cw(c-3449.14,2539.45) X-MOT.3@-3514.54,2604.84 ; -3541.62,2539.45 cw(c-3449.14,2539.45) X-MOT.3@-3514.54,2604.84 ; -3541.62,2539.45 cw(c-3449.14,2539.45) X-MOT.3@-3514.54,2604.84 ; -3541.62,2539.45 cw(c-3449.14,2539.45) X-MOT.3@-3514.54,2604.84 ; -3541.62,2577.76 cw(c-3528.01,2564.15) X-MOT.3@-3521.96,2582.42 ; -3541.62,2577.76 ccw(c-3555.23,2591.37) X-MOT.3@-3536.96,2597.42 ; -3541.62,2577.76 cw(c-3528.01,2564.15) X-MOT.3@-3521.96,2582.42 ; -3541.62,2577.76 ccw(c-3555.23,2591.37) X-MOT.3@-3536.96,2597.42 ; -3541.62,2577.76 cw(c-3528.01,2564.15) X-MOT.3@-3521.96,2582.42 ; -3541.62,2577.76 ccw(c-3555.23,2591.37) X-MOT.3@-3536.96,2597.42 ; -3541.62,2577.76 ccw(c-3555.23,2591.37) X-MOT.3@-3536.96,2597.42 ; -3541.62,2577.76 cw(c-3528.01,2564.15) X-MOT.3@-3521.96,2582.42 ; -3541.62,2577.76 ccw(c-3555.23,2591.37) X-MOT.3@-3536.96,2597.42 ; -3541.62,2577.76 cw(c-3528.01,2564.15) X-MOT.3@-3521.96,2582.42 ; -3541.62,2577.76 ccw(c-3555.23,2591.37) X-MOT.3@-3536.96,2597.42 ; -3541.62,2577.76 cw(c-3528.01,2564.15) X-MOT.3@-3521.96,2582.42 ; -3541.62,2577.76 X-MOT.3@-3514.54,2604.84
NetX-MOT_4: U3.21 X-MOT.4 | length 1531.5
  TopLayer w10: U3.21@-3465.62,1967.88 -3412.5,1967.88 cw(c-3421.02,1976.4) -3429.54,1967.88 ; -3435.54,1967.88 ccw(c-3418.52,1999.86) -3386.54,1982.84 ; -3433.54,1967.88 cw(c-3414.22,1957.36) -3403.7,1976.68
  TopLayer w23.62: X-MOT.4@-3414.54,2604.84 -3351.54,2604.84 -3318.54,2571.84 -3318.54,2484.84 ; X-MOT.4@-3397.83,2588.14 cw(c-3357.51,2547.81) -3357.51,2604.84 ; X-MOT.4@-3397.83,2588.14 cw(c-3357.51,2547.81) -3357.51,2604.84 ; X-MOT.4@-3397.83,2588.14 cw(c-3357.51,2547.81) -3357.51,2604.84 ; X-MOT.4@-3397.83,2588.14 cw(c-3357.51,2547.81) -3357.51,2604.84 ; X-MOT.4@-3397.83,2588.14 cw(c-3357.51,2547.81) -3357.51,2604.84 ; X-MOT.4@-3397.83,2588.14 cw(c-3357.51,2547.81) -3357.51,2604.84 ; X-MOT.4@-3397.83,2621.55 ccw(c-3357.51,2661.87) -3357.51,2604.84 ; X-MOT.4@-3397.83,2621.55 ccw(c-3357.51,2661.87) -3357.51,2604.84 ; X-MOT.4@-3397.83,2621.55 ccw(c-3357.51,2661.87) -3357.51,2604.84 ; X-MOT.4@-3397.83,2621.55 ccw(c-3357.51,2661.87) -3357.51,2604.84 ; X-MOT.4@-3397.83,2621.55 ccw(c-3357.51,2661.87) -3357.51,2604.84 ; X-MOT.4@-3397.83,2621.55 ccw(c-3357.51,2661.87) -3357.51,2604.84
  TopLayer w25: -3412.5,1967.88 -3318.54,2061.84 -3318.54,2562.79